# EAGLE board PowerBoard (EAGLE 9.6.2)
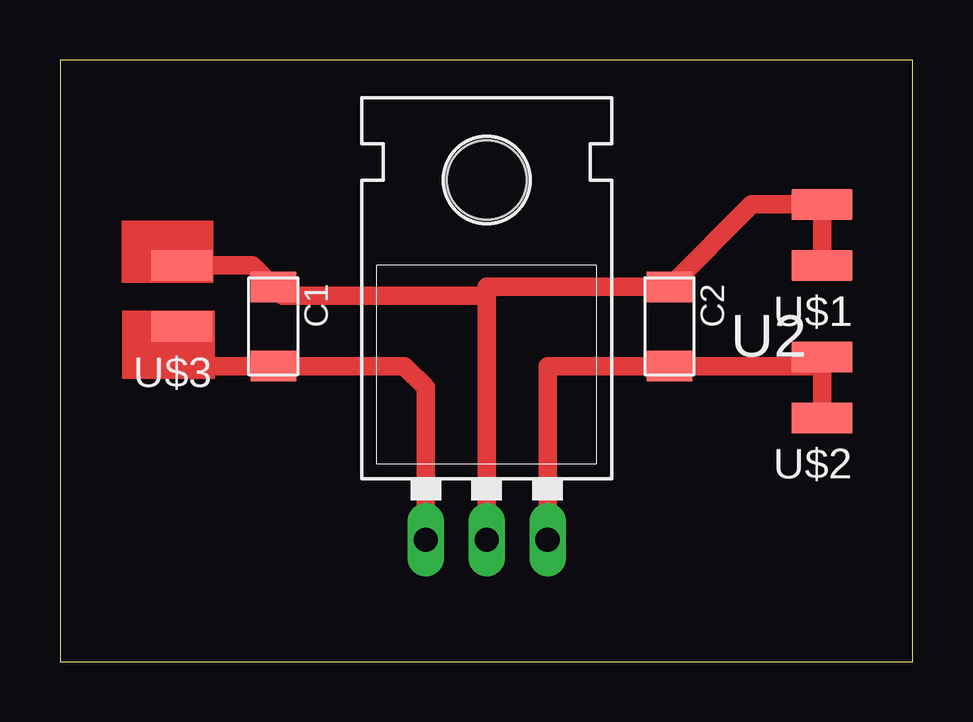
[diagram p0: board, top side]

Size 35.54 x 25.07 mm. Coordinates in mm from the lower left corner, seen from the top.
Outline: 0,0 35.54,0 35.54,25.07 0,25.07 0,0
Copper layers (1*16): Top 0.035mm / dielectric 1.5mm / Bottom 0.035mm
Design rules "default": minimum track width 6mil, minimum drill 0.35mm, track to track 6mil, track to pad 6mil, pad to pad 6mil, via to via 6mil, smd to smd 6mil, copper to edge 40mil, drill to drill 6mil, minimum pad ring 10mil, minimum via ring 8mil, stop-mask expansion 4mil, vias tented up to drill 0mil, thermal gap 10mil

## Footprints (pad centres in the part's own frame; a part is rotated, then mirrored left to right if it is on the bottom)
C1206FAB = smd 1.27 x 1.905: 1 -1.651,0; 2 1.651,0
TO-220-ALT = drill 1.016 long: GND 0,-3.81; IN -2.54,-3.81; OUT 2.54,-3.81 | hole 3.302: 0,11.176
1X02SMD = smd 2.54 x 1.27: 1 -2.54,1.27; 2 -2.54,-1.27

## Placement (x,y rotation side)
C1  [C1206FAB]  8.89,13.97 270 top
C2  [C1206FAB]  25.4,13.97 270 top
U2  [TO-220-ALT]  17.78,8.89 0 top
U$1  CONN_02_SMD  [1X02SMD]  29.21,17.78 180 top
U$2  CONN_02_SMD  [1X02SMD]  29.21,11.43 180 top
U$3  CONN_02_SMD  [1X02SMD]  2.54,15.24 180 top

## Library data of the parts
C1 C2 U$1-U$3 = fab_new
U2 = SparkFun-IC-Power; PROD_ID: VREG-08450; SF_ID: COM-00107

## Nets
N$1: C1.2 U2.IN U$3.1
N$3: C2.2 U2.OUT U$2.1 U$2.2
N$4: C1.1 C2.1 U2.GND U$1.1 U$1.2 U$3.2

## Tracks (layer width: path | path; a pad name or v marks a point on that pad's centre or on a via)
N$1
  Top 0.762: U$3.1 5.08,12.32 C1.2 14.35,12.32 15.24,11.43 U2.IN
N$3
  Top 0.432: U$2.2 31.37,12.32
  Top 0.762: U2.OUT 20.32,12.32 C2.2 31.37,12.32 | U$2.2 U$2.1
N$4
  Top 0.432: C1.1 9.27,15.24 | 17.78,15.24 U2.GND
  Top 0.762: C1.1 8,16.51 U$3.2 | 17.78,15.24 9.27,15.24 | U2.GND 17.78,15.62 C2.1 28.83,19.05 U$1.2 U$1.1
(copper drawn outside any net)
  shapes: Top area x2